# Altium PCB DVD.PcbDoc (part 1 of 2)
Units mm, origin at the board's own origin, x right, y up, seen from the top; angles counter-clockwise.
Board outline 60 x 90 mm, 2 copper layers (Top Layer, Bottom Layer), stack 1.671 mm thick; 69 components, 43 nets, 255 pads, 31 vias.
Unrouted connection lines stored in the file: 70.
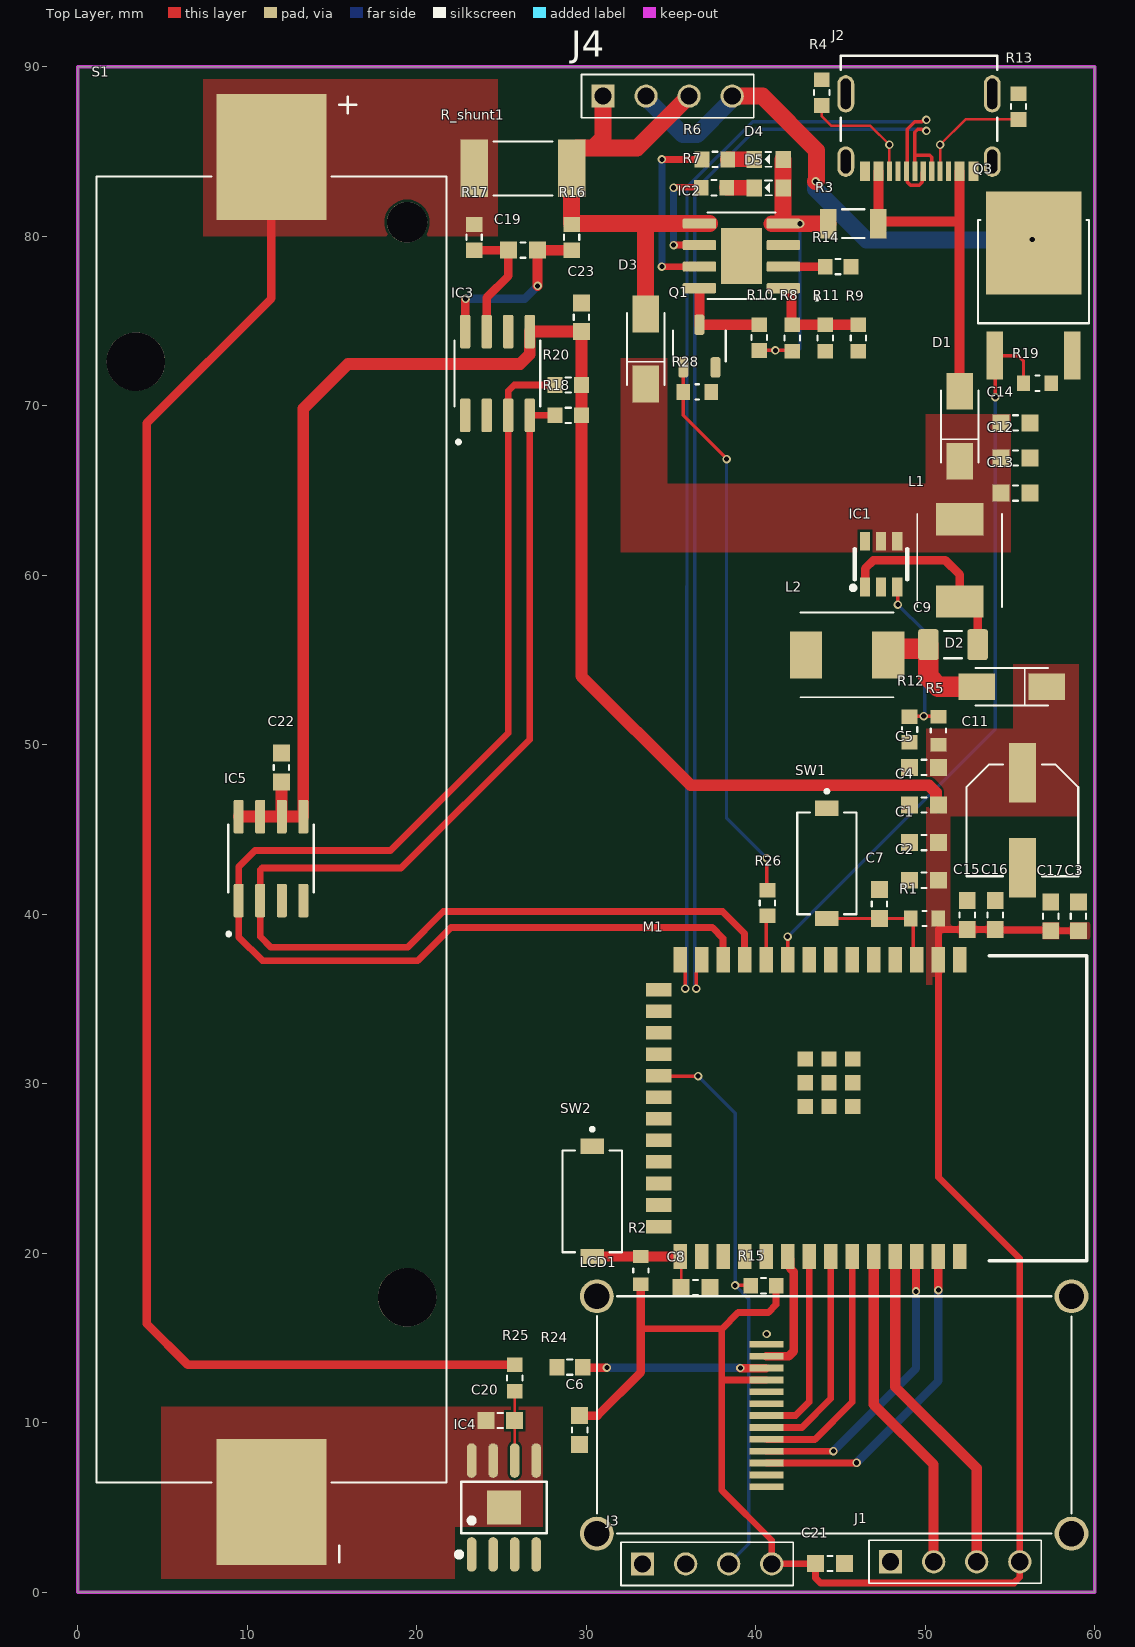
[diagram p0: Top Layer view]
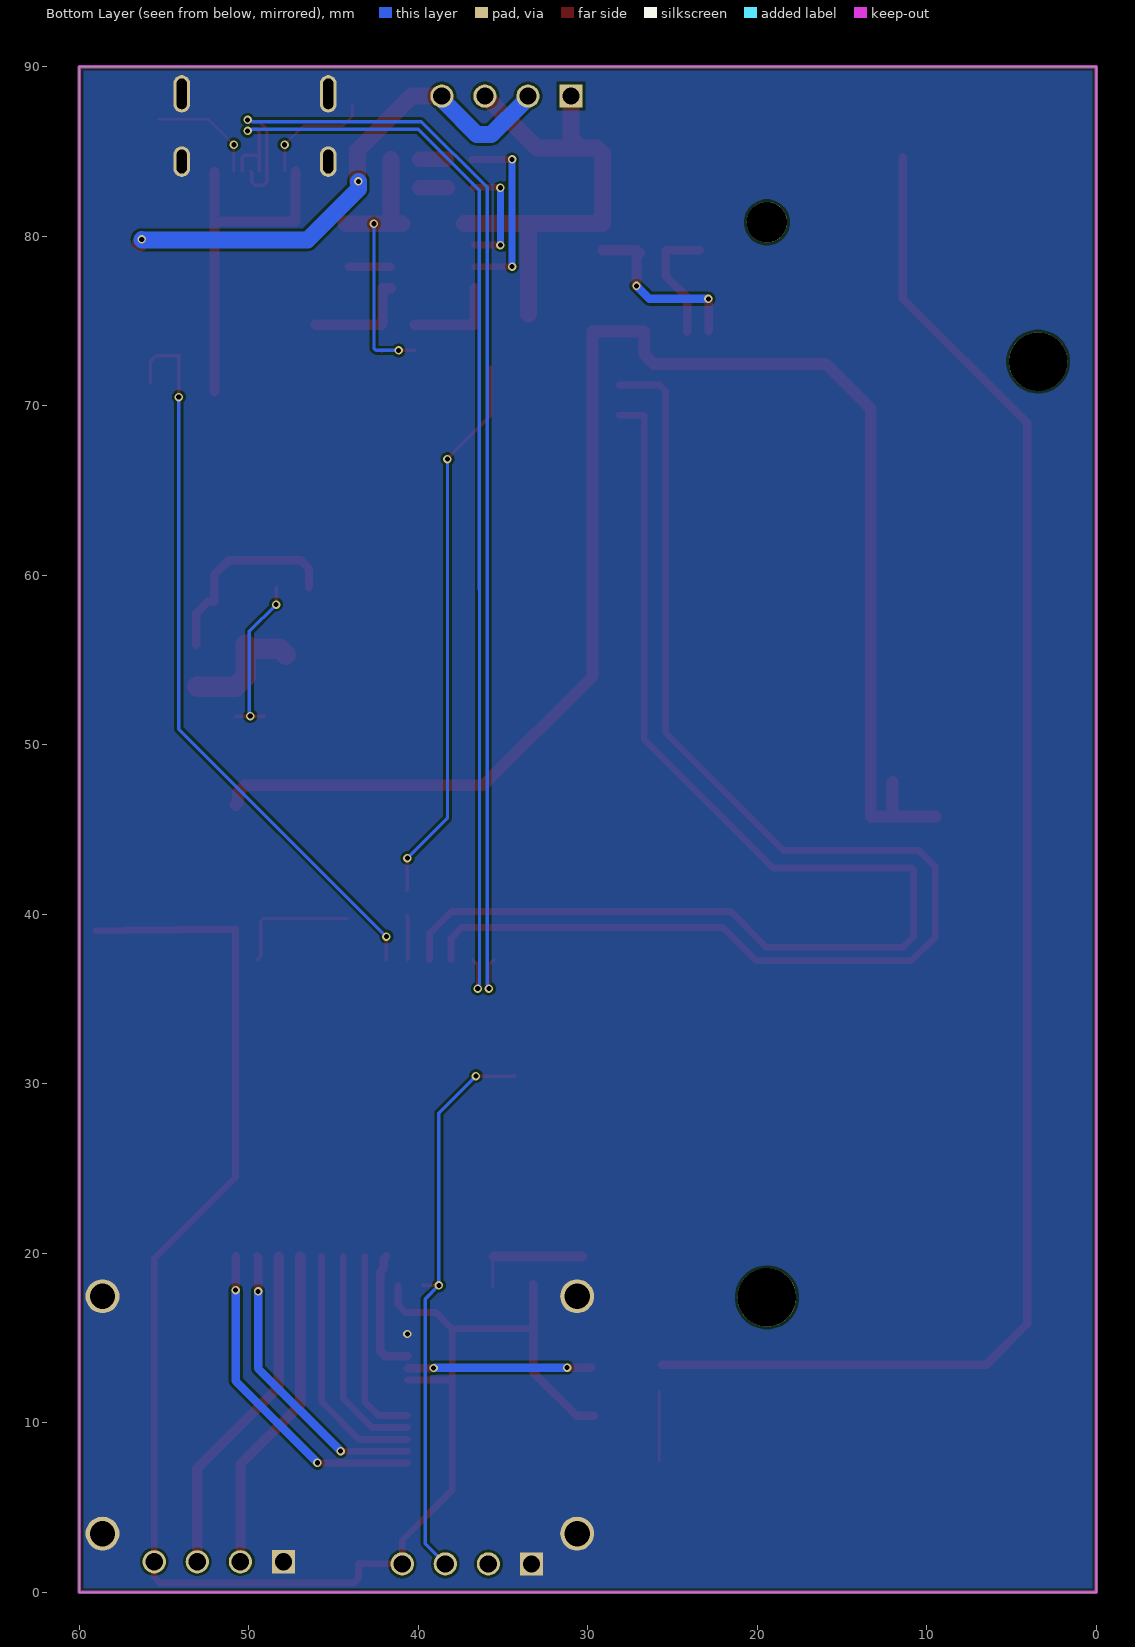
[diagram p1: Bottom Layer view, seen from below]
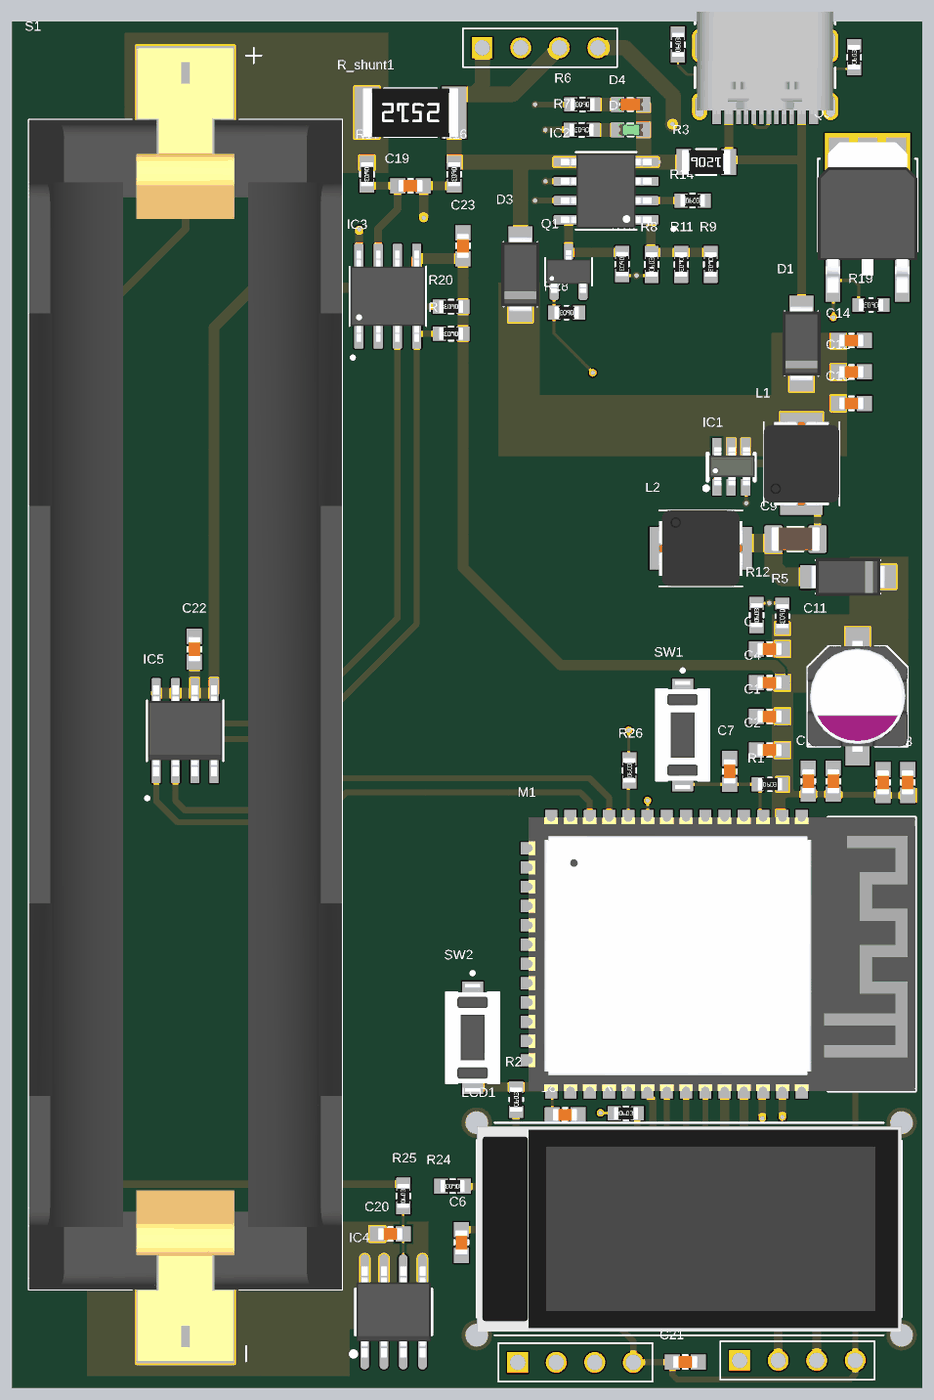
[diagram p2: 3D render of the assembled board from above, using the file's embedded part models]

## Layer stack, top to bottom
Top Solder: solder mask 0.0102, Solder Resist, Dk 3.5
Top Layer: signal copper 0.0356
Dielectric 1: dielectric 1.6, FR-4, Dk 4.8
Bottom Layer: signal copper 0.0356
Bottom Solder: solder mask 0.0102, Solder Resist, Dk 3.5

## Board outline
0,0 60,0 60,90 0,90

## Design rules (kind name [scope] priority, off if disabled: settings)
Clearance [All] p1: gap=0.15 ignorepadtopadclearanceinfootprint=FALSE
DiffPairsRouting [All] p1: maxlimit=0.254 minlimit=0.2 mostfreqgap=0.254 toplayer_minwidth=0.2 toplayer_maxwidth=0.381 toplayer_prefwidth=0.381 bottomlayer_minwidth=0.2 bottomlayer_maxwidth=0.381 bottomlayer_prefwidth=0.381 maxuncoupledlength=12.7
HoleSize [All] p1: absolutevalues=TRUE maxlimit=5 minlimit=0.025 maxpercent=80.000 minpercent=20.000
HoleToHoleClearance [All] p1: gap=0.05 allowstackedmicrovias=TRUE
MinimumSolderMaskSliver [All] p1: minsoldermaskwidth=0.05
PlaneConnect [All] p1: planeconnectstyle=Direct reliefexpansion=0.508 reliefentries=4 reliefconductorwidth=0.254 reliefairgap=0.254
PolygonConnect [All] p1: connectstyle=Direct reliefconductorwidth=0.254 reliefentries=4 polygonreliefangle="90 Angle" airgapwidth=0.254
RoutingVias [All] p1: holewidth=0.3 width=0.5 viastyle="Through Hole" minholewidth=0.3 minwidth=0.5 maxholewidth=3 maxwidth=5
SilkToSilkClearance [All] p1: silktosilkclearance=0.05
SilkToSolderMaskClearance [IsPad] p1: minsilkscreentomaskgap=0.05 clearancetoexposedcopper=TRUE
SolderMaskExpansion [All] p1: expansion=0.102 istentingtop=FALSE
Width [All] p1: maxlimit=3 minlimit=0.15 preferedwidth=0.15
23 further rules are at their usual default settings.

## Classes and differential pairs
differential pair ESP-D: +ESP-D_P -ESP-D_N

## Components (designator, comment, footprint, x,y, rotation, side; value= is the part's Value field where it differs from the comment)
C1 "22 µF ±20% 10V Ceramic Capacitor X5R 0603 (1608 Metric)" SMD-CAP-0603-YAGEO 49.925,44.226 r0 top value=22uF
C2 "10 µF ±20% 25V Ceramic Capacitor X5R 0603 (1608 Metric)" SMD-CAP-0603-YAGEO 49.925,42.006 r180 top value=10uF
C3 "1 µF ±10% 16V Ceramic Capacitor X7R 0603 (1608 Metric)" SMD-CAP-0603-YAGEO 59.03,39.878 r90 top value=1uF
C4 "1 µF -20%, +80% 10V Ceramic Capacitor Y5V (F) 0603 (1608 Metric)" SMD-CAP-0603-YAGEO 49.925,46.446 r0 top value=1uF
C5 "0.1 µF ±10% 16V Ceramic Capacitor X7R 0603 (1608 Metric)" SMD-CAP-0603-YAGEO 49.925,48.666 r0 top value=0.1uF
C6 "0.1 µF ±10% 16V Ceramic Capacitor X7R 0603 (1608 Metric)" SMD-CAP-0603-YAGEO 29.616,9.576 r90 top value=0.1uF
C7 "0.1 µF ±10% 100V Ceramic Capacitor X7R 0603 (1608 Metric)" SMD-CAP-0603-YAGEO 47.295,40.601 r270 top value=0.1uF
C8 "0.1 µF ±10% 100V Ceramic Capacitor X7R 0603 (1608 Metric)" SMD-CAP-0603-YAGEO 36.449,17.983 r180 top value=0.1uF
C9 "1 µF ±10% 100V Ceramic Capacitor X7R 1206 (3216 Metric)" SMD-CAP-1206-KEMET 51.638,55.905 r180 top value=1uF
C11 "100 µF 25 V Aluminum - Polymer Capacitors Radial, Can - SMD 30mOhm 10000 Hrs @ 105°C" SMD-DxLxW-6.3x6.6x6.6-PEC 55.728,45.542 r270 top value=100uF
C12 "10 µF ±20% 25V Ceramic Capacitor X5R 0603 (1608 Metric)" SMD-CAP-0603-YAGEO 55.321,66.916 r180 top value=10uF
C13 "1 µF -20%, +80% 10V Ceramic Capacitor Y5V (F) 0603 (1608 Metric)" SMD-CAP-0603-YAGEO 55.321,64.846 r180 top value=1uF
C14 "0.1 µF ±10% 16V Ceramic Capacitor X7R 0603 (1608 Metric)" SMD-CAP-0603-YAGEO 55.321,68.986 r180 top value=0.1uF
C15 "10 µF ±20% 25V Ceramic Capacitor X5R 0603 (1608 Metric)" SMD-CAP-0603-YAGEO 52.476,39.954 r90 top value=10uF
C16 "2.2 µF ±10% 25V Ceramic Capacitor X5R 0603 (1608 Metric)" SMD-CAP-0603-YAGEO 54.127,39.954 r270 top value=2.2uF
C17 "0.1 µF ±10% 100V Ceramic Capacitor X7R 0603 (1608 Metric)" SMD-CAP-0603-YAGEO 57.404,39.878 r270 top value=0.1uF
C19 "0.1 µF ±10% 10V Ceramic Capacitor X7R 0603 (1608 Metric)" SMD-CAP-0603-YAGEO 26.264,79.174 r180 top value=0.01uF
C20 "0.1 µF ±10% 16V Ceramic Capacitor X7R 0603 (1608 Metric)" SMD-CAP-0603-YAGEO 24.931,10.135 r0 top value=0.1uF
C21 "0.1 µF ±10% 16V Ceramic Capacitor X7R 0603 (1608 Metric)" SMD-CAP-0603-YAGEO 44.374,1.702 r180 top value=0.1uF
C22 "0.1 µF ±10% 16V Ceramic Capacitor X7R 0603 (1608 Metric)" SMD-CAP-0603-YAGEO 12.014,48.653 r270 top value=0.1uF
C23 "0.1 µF ±10% 16V Ceramic Capacitor X7R 0603 (1608 Metric)" SMD-CAP-0603-YAGEO 29.718,75.221 r270 top value=0.1uF
D1 "Diode 40 V 3A Surface Mount DO-214AC (SMA)" SMD-DO-214AC-214-CT 52.032,68.783 r90 top
D2 "Diode 40 V 3A Surface Mount DO-214AC (SMA)" SMD-DO-214AC-214-CT 55.1,53.416 r180 top
D3 "Diode 40 V 3A Surface Mount DO-214AC (SMA)" SMD-DO-214AC-214-CT 33.503,73.348 r90 top
D4 "0603 RED" LED0603_RED 40.767,84.531 r180 top
D5 "0603 GREEN" LED0603_GREEN 40.767,82.855 r180 top
IC1 "SX1308" SOT23-6-SX1308 46.446,59.301 r90 top
IC2 "TP4056" SOIC-8-TP4056 39.153,78.838 r180 top
IC3 "Current Monitor Regulator High-Side 10mA 8-SOIC" SOIC-8-TI 24.765,71.901 r90 top
IC4 "XB8089D" SOIC-8-XB8089D 25.146,5.004 r0 top
IC5 "Temperature Sensor Digital, Local -55°C ~ 125°C 9 b 8-SOIC" SOIC-8-ADI 11.405,43.282 r90 top
J1 "Connector Header Through Hole 4 position 0.100\" (2.54mm)" "HEADER-2.54-4 - U3D" 51.765,1.803 r0 top
J2 "USB-C (USB TYPE-C) USB 2.0 Receptacle Connector 24 (16+8 Dummy) Position Surface Mount, Right Angle; Through Hole" TYPE-C-HOR-RECEPTACLE-24PIN-MOLEX 49.632,87.249 r180 top
J3 "Connector Header Through Hole 4 position 0.100\" (2.54mm)" "HEADER-2.54-4 - U3D" 37.135,1.676 r0 top
J4 "Connector Header Through Hole 4 position 0.100\" (2.54mm)" "HEADER-2.54-4 - U3D" 34.798,88.265 r0 top
L1 "2.2 µH Shielded Drum Core, Wirewound Inductor 6.3 A 22mOhm Max 2-SMD, J-Lead" SMD-HxLxW-3.0x5.5x5.0-PEC 52.032,60.872 r270 top value=2.2uH
L2 "2.2 µH Shielded Drum Core, Wirewound Inductor 6.3 A 22mOhm Max 2-SMD, J-Lead" SMD-HxLxW-3.0x5.5x5.0-PEC 45.39,55.296 r180 top value=2.2uH
LCD1 "LCD ST7789" ST7735S-80x160-0.96INCH 44.628,10.465 r0 top locked
M1 "Bluetooth, WiFi 802.11b/g/n, Bluetooth v4.2 +EDR Transceiver Module 2.4GHz ~ 2.5GHz PCB Trace Surface Mount" MODULE-ESP32-S3-WROOM-1-N16R8 46.785,28.563 r270 top
Q1 "N-Channel 30 V 5.7A (Ta) 1.4W (Ta) Surface Mount SOT-23-3" SOT23-3-AOEI 36.678,73.518 r90 top value=5.7A
Q3 "N-Channel 60 V 7A (Ta), 37A (Tc) 2.1W (Ta), 60W (Tc) Surface Mount TO-252 (DPAK)" TO252 56.388,77.089 r90 top
R1 "10 kOhms ±1% 0.1W, 1/10W Chip Resistor 0603 (1608 Metric) Moisture Resistant Thick Film" SMD-RES-0603-YAGEO 49.955,39.751 r0 top value=10K
R2 "10 kOhms ±1% 0.1W, 1/10W Chip Resistor 0603 (1608 Metric) Moisture Resistant Thick Film" SMD-RES-0603-YAGEO 33.223,18.993 r90 top value=10K
R3 "100 mOhms ±5% 0.25W, 1/4W Chip Resistor 1206 (3216 Metric) Current Sense Thick Film" SMD-RES-1206-YAGEO 45.752,80.743 r180 top value=0.1R
R4 "5.1 kOhms ±1% 0.1W, 1/10W Chip Resistor 0603 (1608 Metric) Automotive AEC-Q200 Thick Film" SMD-RES-0603-SEI 43.891,88.468 r90 top value=5.1K
R5 "10 kOhms ±1% 0.1W, 1/10W Chip Resistor 0603 (1608 Metric) Moisture Resistant Thick Film" SMD-RES-0603-YAGEO 50.775,50.83 r270 top value=10K
R6 "1 kOhms ±1% 0.25W, 1/4W Chip Resistor 0603 (1608 Metric) Automotive AEC-Q200, Pulse Withstanding Thick Film" SMD-RES-0603-SEI 37.592,84.531 r180 top value=1K
R7 "1 kOhms ±1% 0.25W, 1/4W Chip Resistor 0603 (1608 Metric) Automotive AEC-Q200, Pulse Withstanding Thick Film" SMD-RES-0603-SEI 37.541,82.855 r180 top value=1K
R8 "510 mOhms ±1% 0.2W, 1/5W Chip Resistor 0603 (1608 Metric) Automotive AEC-Q200, Current Sense Thick Film" SMD-RES-0603-RS 42.156,73.993 r90 top value=0.5R
R9 "510 mOhms ±1% 0.2W, 1/5W Chip Resistor 0603 (1608 Metric) Automotive AEC-Q200, Current Sense Thick Film" SMD-RES-0603-RS 46.05,73.993 r270 top value=0.5R
R10 "1 kOhms ±1% 0.25W, 1/4W Chip Resistor 0603 (1608 Metric) Automotive AEC-Q200, Pulse Withstanding Thick Film" SMD-RES-0603-SEI 40.208,74.018 r270 top value=1K
R11 "510 mOhms ±1% 0.2W, 1/5W Chip Resistor 0603 (1608 Metric) Automotive AEC-Q200, Current Sense Thick Film" SMD-RES-0603-RS 44.103,73.993 r270 top value=0.5R
R12 "2.2 kOhms ±1% 0.1W, 1/10W Chip Resistor 0603 (1608 Metric) Automotive AEC-Q200 Thick Film" SMD-RES-0603-SEI 49.075,50.895 r90 top value=2.2K
R13 "5.1 kOhms ±1% 0.1W, 1/10W Chip Resistor 0603 (1608 Metric) Automotive AEC-Q200 Thick Film" SMD-RES-0603-SEI 55.499,87.644 r90 top value=5.1K
R14 "1 kOhms ±1% 0.25W, 1/4W Chip Resistor 0603 (1608 Metric) Automotive AEC-Q200, Pulse Withstanding Thick Film" SMD-RES-0603-SEI 44.858,78.203 r0 top value=1K
R15 "5.1 kOhms ±1% 0.1W, 1/10W Chip Resistor 0603 (1608 Metric) Automotive AEC-Q200 Thick Film" SMD-RES-0603-SEI 40.462,18.085 r0 top value=5.1K
R16 "10 Ohms ±1% 0.1W, 1/10W Chip Resistor 0603 (1608 Metric) Automotive AEC-Q200 Thick Film" SMD-RES-0603-SE 29.137,79.934 r270 top value=10R
R17 "10 Ohms ±1% 0.1W, 1/10W Chip Resistor 0603 (1608 Metric) Automotive AEC-Q200 Thick Film" SMD-RES-0603-SE 23.391,79.934 r270 top value=10R
R18 "4.7 kOhms ±1% 0.1W, 1/10W Chip Resistor 0603 (1608 Metric) Anti-Sulfur Thick Film" SMD-RES-0603-RS 28.938,69.431 r180 top value=4.7K
R19 "10 kOhms ±1% 0.1W, 1/10W Chip Resistor 0603 (1608 Metric) Moisture Resistant Thick Film" SMD-RES-0603-YAGEO 56.617,71.323 r180 top value=10K
R20 "4.7 kOhms ±1% 0.1W, 1/10W Chip Resistor 0603 (1608 Metric) Anti-Sulfur Thick Film" SMD-RES-0603-RS 28.938,71.222 r180 top value=4.7K
R24 "10 Ohms ±1% 0.1W, 1/10W Chip Resistor 0603 (1608 Metric) Automotive AEC-Q200 Thick Film" SMD-RES-0603-SE 29.032,13.284 r180 top value=10R
R25 "100 Ohms ±1% 0.1W, 1/10W Chip Resistor 0603 (1608 Metric) Automotive AEC-Q200, High Voltage Thick Film" SMD-RES-0603-RS 25.781,12.642 r90 top value=100R
R26 "0 Ohms Jumper Chip Resistor 0603 (1608 Metric) Automotive AEC-Q200 Thick Film" SMD-RES-0603-SEI 40.691,40.665 r90 top value=0R
R28 "10 kOhms ±1% 0.1W, 1/10W Chip Resistor 0603 (1608 Metric) Moisture Resistant Thick Film" SMD-RES-0603-YAGEO 36.548,70.815 r180 top value=10K
R_shunt1 "0.1R" SMD-RES-2512-VD 26.264,83.998 r180 top value=10mR
S1 "1042" SMD-18650-BAT-1042 11.43,45 r90 top locked
SW1 "Tactile Switch SPST-NO Top Actuated Surface Mount" SW-HxLxW-5.0x6.0x3.5-C&K 44.196,43.001 r270 top
SW2 "Tactile Switch SPST-NO Top Actuated Surface Mount" SW-HxLxW-5.0x6.0x3.5-C&K 30.353,23.063 r270 top

## Footprints (in the part's own frame and the unit in brackets; to place one, negate y for a bottom-side part, rotate by r counter-clockwise, add the part's x,y. Pads: shape width x height; smd on the part's side, far side on the other; paste and mask are expansions set on the pad)
"HEADER-2.54-4 - U3D" [mm]
  rect 1.37x1.37 / inner round 1.37 / far side rect 1.37x1.37 hole 1.02: 01(-3.81,0)
  round 1.37 hole 1.02: 02(-1.27,0) 03(1.27,0) 04(3.81,0)
  silkscreen extent -5.08,-1.27 5.08,1.27
LED0603_GREEN [mm]
  rect 0.9x1 smd paste+0 mask+0.051: 1(-0.85,0) 2(0.85,0)
  silkscreen extent -0.2,-0.43 0.23,0.43, body extent -0.82,-0.4 0.78,0.4, height 0.53
LED0603_RED [mm]
  rect 0.9x1 smd paste+0 mask+0.051: 1(-0.85,0) 2(0.85,0)
  silkscreen extent -0.18,-0.43 0.23,0.43, body extent -0.82,-0.4 0.78,0.4, height 0.53
MODULE-ESP32-S3-WROOM-1-N16R8 [mm]
  rect 1.5x0.8 smd: 1(-8.75,5.26) 2(-8.75,3.99) 3(-8.75,2.72) 4(-8.75,1.45) 5(-8.75,0.18) 6(-8.75,-1.09) 7(-8.75,-2.36) 8(-8.75,-3.63) 9(-8.75,-4.9) 10(-8.75,-6.17) 11(-8.75,-7.44) 12(-8.75,-8.71) 13(-8.75,-9.98) 14(-8.75,-11.25) 27(8.75,-11.25) 28(8.75,-9.98) 29(8.75,-8.71) 30(8.75,-7.44) 31(8.75,-6.17) 32(8.75,-4.9) 33(8.75,-3.63) 34(8.75,-2.36) 35(8.75,-1.09) 36(8.75,0.18) 37(8.75,1.45) 38(8.75,2.72) 39(8.75,3.99) 40(8.75,5.26)
  rect 0.8x1.5 smd: 15(-6.985,-12.5) 16(-5.715,-12.5) 17(-4.445,-12.5) 18(-3.175,-12.5) 19(-1.905,-12.5) 20(-0.635,-12.5) 21(0.635,-12.5) 22(1.905,-12.5) 23(3.175,-12.5) 24(4.445,-12.5) 25(5.715,-12.5) 26(6.985,-12.5)
  rect 0.9x0.9 smd: 41(-1.5,-2.46) 42(-1.5,-1.06) 43(-2.9,-1.06) 44(-2.9,-2.46) 45(-2.9,-3.86) 46(-1.5,-3.86) 47(-0.1,-3.86) 48(-0.1,-2.46) 49(-0.1,-1.06)
  silkscreen extent -9,7 9,12.75, body extent -9,-12.75 9,12.75, height 3.25
SMD-18650-BAT-1042 [mm]
  rect 7.46x6.47 smd: N(-39.67,0) P(39.67,0)
  round 3.45 hole 3.45 unplated: ""(-27.6,-8) ""(27.6,8)
  round 2.39 hole 2.39 unplated: ""(35.82,-8)
  silkscreen extent -43.25,-10.32 43.25,10.32, body extent -43.23,-10.33 43.23,10.33, height 14.86
SMD-CAP-0603-YAGEO [mm]
  rect 1x1 smd: 1(-0.85,0) 2(0.85,0)
  silkscreen extent -0.15,-0.45 0.15,0.45, body extent -0.8,-0.4 0.8,0.4, height 0.87
SMD-CAP-1206-KEMET [mm]
  rrect25% 1.21x1.82 smd: 1(-1.45,0) 2(1.45,0)
  silkscreen extent -0.52,-0.8 0.52,0.8, body extent -1.6,-0.8 1.6,0.8, height 1.4
SMD-DO-214AC-214-CT [mm]
  rect 2.17x1.57 smd: 1(-2.065,0) 2(2.065,0)
  silkscreen extent -2.12,-1.12 2.12,1.12, body extent -2.47,-1.25 2.47,1.25, height 2.2
SMD-DxLxW-6.3x6.6x6.6-PEC [mm]
  rect 3.5x1.6 smd: 1(-2.8,0) 2(2.8,0)
  silkscreen extent -3.3,-3.3 3.3,3.3, body extent -3.65,-3.3 3.65,3.3, height 5.9
SMD-HxLxW-3.0x5.5x5.0-PEC [mm]
  rect 1.905x2.79 smd: 1(-2.425,0) 2(2.425,0)
  silkscreen extent -2.75,-2.5 2.75,2.5, body extent -2.75,-2.5 2.75,2.5, height 3.01
SMD-RES-0603-RS [mm]
  rect 0.87x0.93 smd: 1(-0.78,0) 2(0.78,0)
  silkscreen extent -0.15,-0.45 0.15,0.45, body extent -0.8,-0.4 0.8,0.4, height 0.47
SMD-RES-0603-SE [mm]
  rect 0.9x0.97 smd: 1(-0.76,0) 2(0.76,0)
  silkscreen extent -0.15,-0.45 0.15,0.45, body extent -0.8,-0.4 0.8,0.4, height 0.47
SMD-RES-0603-SEI [mm]
  rect 0.87x0.93 smd: 1(-0.755,0) 2(0.755,0)
  silkscreen extent -0.15,-0.45 0.15,0.45, body extent -0.8,-0.4 0.8,0.4, height 0.47
SMD-RES-0603-YAGEO [mm]
  rect 0.79x0.93 smd: 1(-0.82,0) 2(0.82,0)
  silkscreen extent -0.11,-0.45 0.11,0.45, body extent -0.8,-0.4 0.8,0.4, height 0.47
SMD-RES-1206-YAGEO [mm]
  rect 0.97x1.73 smd: 1(-1.48,0) 2(1.48,0)
  silkscreen extent -0.67,-0.85 0.67,0.85, body extent -1.6,-0.8 1.6,0.8, height 0.62
SMD-RES-2512-VD [mm]
  rect 1.62x3.4 smd: 1(-2.873,0) 2(2.873,0)
  silkscreen extent -1.74,-1.59 1.74,1.59, body extent -3.15,-1.6 3.15,1.6, height 0.66
SOIC-8-ADI [mm]
  rrect25% 1.97x0.59 smd: 1(-2.475,1.905) 2(-2.475,0.635) 3(-2.475,-0.635) 4(-2.475,-1.905) 5(2.475,-1.905) 6(2.475,-0.635) 7(2.475,0.635) 8(2.475,1.905)
  silkscreen extent -4.54,-2.52 2,2.59, body extent -3,-2.45 3,2.45, height 1.75
SOIC-8-TI [mm]
  rrect25% 1.97x0.6 smd paste+0 mask+0.102: 1(-2.47,1.905) 2(-2.47,0.635) 3(-2.47,-0.635) 4(-2.47,-1.905) 5(2.47,-1.905) 6(2.47,-0.635) 7(2.47,0.635) 8(2.47,1.905)
  silkscreen extent -4.14,-2.53 1.95,2.53, body extent -3,-2.45 3,2.45, height 1.75
SOIC-8-TP4056 [mm]
  rrect25% 1.97x0.6 smd: 1(-2.475,1.905) 2(-2.475,0.635) 3(-2.475,-0.635) 4(-2.475,-1.905) 5(2.475,-1.905) 6(2.475,-0.635) 7(2.475,0.635) 8(2.475,1.905)
  rect 2.413x3.302 smd paste-3: 9(0,0)
  silkscreen extent -4.54,-2.55 2,2.6, body extent -3,-2.45 3,2.45, height 1.75
SOIC-8-XB8089D [mm]
  oval 0.574x2.038 smd: 1(-1.905,-2.769) 2(-0.635,-2.769) 3(0.635,-2.769) 4(1.905,-2.769) 5(1.905,2.769) 6(0.635,2.769) 7(-0.635,2.769) 8(-1.905,2.769)
  rect 2x2 smd: 9(0,0)
  silkscreen extent -2.79,-2.92 2.53,1.52, body extent -2.45,-3 2.45,3, height 1.75
SOT23-3-AOEI [mm]
  rrect50% 1.21x0.59 smd: 1(-1.255,0.95) 2(-1.255,-0.95) 3(1.255,0)
  silkscreen extent -0.9,-1.55 0.9,1.55, body extent -1.4,-1.45 1.4,1.45, height 1.25
SOT23-6-SX1308 [mm]
  rect 1.1x0.6 smd paste+0 mask+0.051: 1(0,0) 2(0,-0.95) 3(0,-1.9) 4(2.7,-1.9) 5(2.7,-0.95) 6(2.7,0)
  silkscreen extent -0.17,-2.5 2.25,0.83, body extent 0.15,-2.52 2.65,0.48, height 1.1
ST7735S-80x160-0.96INCH [mm]
  rect 2x0.4 smd: 1(-4,-4.236) 2(-4,-3.536) 3(-4,-2.836) 4(-4,-2.136) 5(-4,-1.436) 6(-4,-0.736) 7(-4,-0.036) 8(-4,0.664) 9(-4,1.364) 10(-4,2.064) 11(-4,2.764) 12(-4,3.464) 13(-4,4.164)
  round 2 hole 1.5 mask+0.102: 14(-14,7) 15(14,7) 16(-14,-7) 17(14,-7)
  silkscreen extent -14,-7 14,7, body extent -13.98,-6.74 13.98,6.74, height 2.87
SW-HxLxW-5.0x6.0x3.5-C&K [mm]
  rect 0.9x1.4 smd: 1(-3.25,0) 2(3.25,0)
  silkscreen extent -4.35,-1.75 3,1.75, body extent -3.55,-1.75 3.55,1.75, height 4.3
TO252 [mm]
  rect 2.83x0.97 smd: 1(-4.14,2.29) 2(-4.14,-2.29)
  rect 6.1x5.63 smd paste-4: 3(2.51,0)
  silkscreen extent -2.22,-3.27 3.87,3.27, body extent -4.95,-3.27 4.95,3.27, height 2.51
TYPE-C-HOR-RECEPTACLE-24PIN-MOLEX [mm]
  rect 0.59x1.15 smd mask+0.064: A1B12(-3.2,3.425) A4B9(-2.4,3.425) B1A12(3.2,3.425) B4A9(2.4,3.425)
  rect 0.298x1.15 smd mask+0.064: A5(-1.25,3.425) A6(-0.25,3.425) A7(0.25,3.425) A8(1.25,3.425) B5(1.75,3.425) B6(0.75,3.425) B7(-0.75,3.425) B8(-1.75,3.425)
  oval 1x2.2 hole 0.6 slot 1.8 at 90 deg mask+0.064: SHIELD(-4.32,-1.15) SHIELD(4.32,-1.15)
  oval 1x1.8 hole 0.6 slot 1.4 at 90 deg mask+0.064: SHIELD(-4.32,2.85) SHIELD(4.32,2.85)
  silkscreen extent -4.62,-3.4 4.62,1.63, body extent -4.47,-3.38 4.47,3.38, height 3.17

## Part data
C1: library part "CAP; 22uF; 25V; SMD; CC0603MRX5R6BB226", "Multilayer Ceramic Capacitor, 22 uF, 10 V, ï¿½ 20%, X5R, 0603 [1608 Metric]", Manufacturer=Yageo, Manufacturer Part Number=CC0603MRX5R6BB226, Package=0603, Supplier Part Number=9078094, Category="Ceramic Capacitors", ComponentLink1Description=http://www.mouser.com/ds/2/447/Yageo_UPY-GP_NP0_16V-to-50V_9-358835.pdf?src-supplier=Mouser, ComponentLink1URL=http://www.mouser.com/ds/2/447/Yageo_UPY-GP_NP0_16V-to-50V_9-358835.pdf?src-supplier=Mouser, ComponentLink2Description=http://www.yageo.com/documents/recent/UPY-GPHC_X5R_4V-to-50V_25.pdf?src-supplier=Digikey, ComponentLink2URL=http://www.yageo.com/documents/recent/UPY-GPHC_X5R_4V-to-50V_25.pdf?src-supplier=Digikey, ComponentLink3Description=https://datasheet.octopart.com/CC0603MRX5R6BB226-Yageo-datasheet-137875056.pdf?src-supplier=Future+Electronics, ComponentLink3URL=https://datasheet.octopart.com/CC0603MRX5R6BB226-Yageo-datasheet-137875056.pdf?src-supplier=Future+Electronics, ComponentLink4Description="Link Digikey", ComponentLink4URL=https://www.digikey.com/en/products/detail/yageo/CC0603MRX5R6BB226/5195226, Designer=TVBac, Halogen Free=5694HalogenFree, Lead Free=5697LeadFree, Pricing="4000=0.122, 8000=0.12, 12000=0.119, 16000=0.118 (USD)", RoHS=No, RoHS Compliant=5897YesNo, Stock=780000, Supplier="Future Electronics"
C2 C12 C15: library part "CAP; 10uF; 25V; SMD; 0603; CC0603MRX5R8BB106", "Multilayer Ceramic Capacitor, 10 uF, 25 V, ï¿½ 20%, X5R, 0603 [1608 Metric]", Case Code (Imperial)=0603, Case Code (Metric)=1608, Dielectric=X5R, Manufacturer=Yageo, Manufacturer Part Number=CC0603MRX5R8BB106, Max Operating Temperature=85°C, Min Operating Temperature=-55°C, Supplier Part Number=3086968, Tolerance=20%, Voltage Rating=25V, Case/Package=0603, Category="Ceramic Capacitors", ComponentLink1Description=https://www.yageo.com/upload/media/product/productsearch/datasheet/mlcc/UPY-GPHC_X5R_4V-to-50V_26.pdf?src-supplier=Digikey, ComponentLink1URL=https://www.yageo.com/upload/media/product/productsearch/datasheet/mlcc/UPY-GPHC_X5R_4V-to-50V_26.pdf?src-supplier=Digikey, ComponentLink2Description=https://datasheet.octopart.com/CC0603MRX5R8BB106-Yageo-datasheet-182965619.pdf?src-supplier=Farnell, ComponentLink2URL=https://datasheet.octopart.com/CC0603MRX5R8BB106-Yageo-datasheet-182965619.pdf?src-supplier=Farnell, ComponentLink3Description="Link Digikey", ComponentLink3URL=https://www.digikey.com/en/products/detail/yageo/CC0603MRX5R8BB106/7164378, Designer=TVBac, Halogen Free="Halogen Free", Lead Free="Lead Free", Mounting Technology="Surface Mount", Package=0603, Packaging="Cut Tape", Pricing="4000=0.155, 8000=0.153, 12000=0.151 (USD)", RoHS=Yes, RoHS Compliant=Yes, Series=CC, Stock=296000, Supplier="Future Electronics", Voltage Rating (DC)=25V
C3: library part "CAP; 1uF; 16V; 0603; SMD; CC0603KRX7R7BB105", "0603 1 uF 16 V ±10 % Tolerance X7R SMT Multilayer Ceramic Capacitor", Case Code (Imperial)=0603, Case Code (Metric)=1608, Dielectric=X7R, Manufacturer=Yageo, Manufacturer Part Number=CC0603KRX7R7BB105, Max Operating Temperature=125°C, Min Operating Temperature=-55°C, Package Quantity=1, Supplier Part Number=311-1446-1-ND, Tolerance=10%, Voltage=16V, Case/Package=0603, Category="Ceramic Capacitors", ComponentLink1Description=https://datasheet.ciiva.com/8033/1734573-8033801.pdf?src-supplier=Element14, ComponentLink1URL=https://datasheet.ciiva.com/8033/1734573-8033801.pdf?src-supplier=Element14, ComponentLink2Description=https://datasheet.ciiva.com/8033/1734573-8033800.pdf?src-supplier=Element14, ComponentLink2URL=https://datasheet.ciiva.com/8033/1734573-8033800.pdf?src-supplier=Element14, ComponentLink3Description=https://datasheet.ciiva.com/7978/1489800-7978143.pdf?src-supplier=Element14, ComponentLink3URL=https://datasheet.ciiva.com/7978/1489800-7978143.pdf?src-supplier=Element14, ComponentLink4Description=https://datasheet.ciiva.com/28450/1489800-28450557.pdf?src-supplier=Element14, ComponentLink4URL=https://datasheet.ciiva.com/28450/1489800-28450557.pdf?src-supplier=Element14, ComponentLink5Description=https://datasheet.ciiva.com/176/mlccorderingcode-176789.pdf?src-supplier=Digikey, ComponentLink5URL=https://datasheet.ciiva.com/176/mlccorderingcode-176789.pdf?src-supplier=Digikey, ComponentLink6Description=https://datasheet.ciiva.com/176/mlccorderingcode-176788.pdf?src-supplier=Digikey, ComponentLink6URL=https://datasheet.ciiva.com/176/mlccorderingcode-176788.pdf?src-supplier=Digikey, ComponentLink7Description=https://datasheet.ciiva.com/176/mlccorderingcode-176790.pdf?src-supplier=Digikey, ComponentLink7URL=https://datasheet.ciiva.com/176/mlccorderingcode-176790.pdf?src-supplier=Digikey, ComponentLink8Description=https://datasheet.ciiva.com/5425/upy-gphc-x7r-6-3v-to-50v-8-12304-5425495.pdf?src-supplier=Mouser, ComponentLink8URL=https://datasheet.ciiva.com/5425/upy-gphc-x7r-6-3v-to-50v-8-12304-5425495.pdf?src-supplier=Mouser, ComponentLink9Description="Link Digikey", ComponentLink9URL=https://www.digikey.com/en/products/detail/yageo/CC0603KRX7R7BB105/2833611?s=N4IgTCBcDaIMJwAwDZEGYDSAlAGgdizwCEiBGRAVhAF0BfIA, Construction=Flat, Depth=0.8mm, Designer=TVBac, Dissipation Factor=5%, Halogen Free=5694HalogenFree, Height=0.8mm, Lead Free=5697LeadFree, Length=1.6mm, Material=4241ConductorMaterial, Mounting Technology="Surface Mount", Package=0603, Packaging="Tape and Reel", Pins=2, Pricing="1=0.1, 10=0.066, 50=0.0392, 100=0.0308, 500=0.02274, 1000=0.01882, 4000=0.01785, 8000=0.01626, 12000=0.01545, 20000=0.01456, 28000=0.01404, 40000=0.01353, 100000=0.01313 (USD)", Radiation Hardening=No, Reach SVHC Compliant=Unknown, RoHS=Yes, RoHS Compliant=Yes, Series=CC, Stock=9165861, Supplier=Digikey, Termination=SMD/SMT, Thickness=0.035inch, Voltage Rating=16V, Voltage Rating (DC)=16V, Width=0.031inch
C4 C13: library part "CAP; 1uF; 10V; 0603; SMD; CC0603ZRY5V6BB105", "Surface Mount Ceramic Multilayer Capacitor 1uF -20% to 80% Y5V 10V 0603 Paper T/R", Dielectric Material=4241ConductorMaterial, Manufacturer=Yageo, Manufacturer Part Number=CC0603ZRY5V6BB105, Package=0603, Supplier Part Number=311-1357-1-ND, Voltage Rating (AC)=10V, Category="Ceramic Capacitors", ComponentLink1Description=https://datasheet.ciiva.com/23768/97931-23768032.pdf?src-supplier=Newark, ComponentLink1URL=https://datasheet.ciiva.com/23768/97931-23768032.pdf?src-supplier=Newark, ComponentLink2Description=https://datasheet.ciiva.com/144/mlccorderingcode-144397.pdf?src-supplier=Digikey, ComponentLink2URL=https://datasheet.ciiva.com/144/mlccorderingcode-144397.pdf?src-supplier=Digikey, ComponentLink3Description=https://datasheet.ciiva.com/144/mlccorderingcode-144398.pdf?src-supplier=Digikey, ComponentLink3URL=https://datasheet.ciiva.com/144/mlccorderingcode-144398.pdf?src-supplier=Digikey, ComponentLink4Description=https://datasheet.ciiva.com/144/mlccorderingcode-144399.pdf?src-supplier=Digikey, ComponentLink4URL=https://datasheet.ciiva.com/144/mlccorderingcode-144399.pdf?src-supplier=Digikey, ComponentLink5Description=https://datasheet.ciiva.com/5425/upy-gphc-y5v-6-3v-to-50v-5-5425434.pdf?src-supplier=Mouser, ComponentLink5URL=https://datasheet.ciiva.com/5425/upy-gphc-y5v-6-3v-to-50v-5-5425434.pdf?src-supplier=Mouser, ComponentLink6Description=https://datasheet.ciiva.com/7978/1132289-7978185.pdf?src-supplier=Element14, ComponentLink6URL=https://datasheet.ciiva.com/7978/1132289-7978185.pdf?src-supplier=Element14, ComponentLink7Description=https://datasheet.ciiva.com/8033/1132289-8033926.pdf?src-supplier=Element14, ComponentLink7URL=https://datasheet.ciiva.com/8033/1132289-8033926.pdf?src-supplier=Element14, ComponentLink8Description=https://datasheet.ciiva.com/8033/1132289-8033928.pdf?src-supplier=Element14, ComponentLink8URL=https://datasheet.ciiva.com/8033/1132289-8033928.pdf?src-supplier=Element14, ComponentLink9Description="Link Digikey", ComponentLink9URL=https://www.digikey.com/en/products/detail/yageo/CC0603ZRY5V6BB105/2103095, Designer=TVBac, Halogen Free=5694HalogenFree, Lead Free=5697LeadFree, Pricing="1=0.1, 10=0.041, 50=0.0234, 100=0.0182, 500=0.01366, 1000=0.01074 (USD)", RoHS=Yes, Stock=2070294, Supplier=Digikey
C5 C6 C14 C20 C21 C22 C23: library part "CAP; 0.1uF; 16V; 0603; SMD; CC0603KRX7R7BB104", "0603 0.1 uF 16 V ±10 % Tolerance X7R SMT Multilayer Ceramic Capacitor", Case Code (Imperial)=0603, Case Code (Metric)=1608, Dielectric=X7R, Insulation Resistance=100GR, Manufacturer=Yageo, Manufacturer Part Number=CC0603KRX7R7BB104, Max Operating Temperature=125°C, Min Operating Temperature=-55°C, Package Quantity=1, Supplier Part Number=311-1088-1-ND, Tolerance=10%, Voltage=16V, Case/Package=0603, Category="Ceramic Capacitors", ComponentLink1Description=https://datasheet.ciiva.com/11786/0900766b80d84f1d-11786077.pdf?src-supplier=Rs, ComponentLink1URL=https://datasheet.ciiva.com/11786/0900766b80d84f1d-11786077.pdf?src-supplier=Rs, ComponentLink2Description=https://datasheet.ciiva.com/8033/70765-8033799.pdf?src-supplier=Element14, ComponentLink2URL=https://datasheet.ciiva.com/8033/70765-8033799.pdf?src-supplier=Element14, ComponentLink3Description=https://datasheet.ciiva.com/7978/1489800-7978141.pdf?src-supplier=Element14, ComponentLink3URL=https://datasheet.ciiva.com/7978/1489800-7978141.pdf?src-supplier=Element14, ComponentLink4Description=https://datasheet.ciiva.com/28450/1489800-28450552.pdf?src-supplier=Element14, ComponentLink4URL=https://datasheet.ciiva.com/28450/1489800-28450552.pdf?src-supplier=Element14, ComponentLink5Description=https://datasheet.ciiva.com/46430/1734573-46430156.pdf?src-supplier=Element14, ComponentLink5URL=https://datasheet.ciiva.com/46430/1734573-46430156.pdf?src-supplier=Element14, ComponentLink6Description=https://datasheet.ciiva.com/144/mlccorderingcode-144183.pdf?src-supplier=Digikey, ComponentLink6URL=https://datasheet.ciiva.com/144/mlccorderingcode-144183.pdf?src-supplier=Digikey, ComponentLink7Description=https://datasheet.ciiva.com/144/mlccorderingcode-144182.pdf?src-supplier=Digikey, ComponentLink7URL=https://datasheet.ciiva.com/144/mlccorderingcode-144182.pdf?src-supplier=Digikey, ComponentLink8Description=https://datasheet.ciiva.com/144/mlccorderingcode-144184.pdf?src-supplier=Digikey, ComponentLink8URL=https://datasheet.ciiva.com/144/mlccorderingcode-144184.pdf?src-supplier=Digikey, ComponentLink9Description=https://datasheet.ciiva.com/8033/1734573-8033797.pdf?src-supplier=Element14, ComponentLink9URL=https://datasheet.ciiva.com/8033/1734573-8033797.pdf?src-supplier=Element14, ComponentLink10Description=https://datasheet.ciiva.com/13395/upy-gphc-x7r-6-3v-to-50v-8-13395674.pdf?src-supplier=Mouser, ComponentLink10URL=https://datasheet.ciiva.com/13395/upy-gphc-x7r-6-3v-to-50v-8-13395674.pdf?src-supplier=Mouser, ComponentLink11Description=https://datasheet.ciiva.com/11464/upy-gphc-x7r-6-3v-to-50v-8-11464735.pdf?src-supplier=Avnet, ComponentLink11URL=https://datasheet.ciiva.com/11464/upy-gphc-x7r-6-3v-to-50v-8-11464735.pdf?src-supplier=Avnet, ComponentLink12Description=https://datasheet.ciiva.com/15165/getdatasheetpartid-63554-15165387.pdf?src-supplier=Verical, ComponentLink12URL=https://datasheet.ciiva.com/15165/getdatasheetpartid-63554-15165387.pdf?src-supplier=Verical, ComponentLink13Description="Link Digikey", ComponentLink13URL=https://www.digikey.com/en/products/detail/yageo/CC0603KRX7R7BB104/302822, Depth=0.8mm, Designer=TVBac, Halogen Free="Halogen Free", Height=0.8mm, Lead Free="Lead Free", Length=1.6mm, Material=Ceramic, Mounting Technology="Surface Mount", Package=0603, Packaging="Tape and Reel", Pins=2, Pricing="1=0.1, 10=0.042, 50=0.0238, 100=0.0185, 500=0.01392, 1000=0.01094, 4000=0.00915, 8000=0.00836, 12000=0.00796, 28000=0.00756, 100000=0.00547, 200000=0.00529, 400000=0.00497 (USD)", Radiation Hardening=No, Reach SVHC Compliant=No, RoHS=Yes, RoHS Compliant=Yes, Series=CC, Stock=8705780, Supplier=Digikey, Termination=SMD/SMT, Thickness=0.035inch, Voltage Rating=16V, Voltage Rating (DC)=16V, Width=0.031inch
C7 C8 C17: library part "CAP; 0.1uF; 100V; 0603; SMD; CC0603KRX7R0BB104", "Multilayer Ceramic Capacitors MLCC - SMD/SMT 100V 0.1uF X7R 0603 10%", Case Code (Imperial)=0603, Case Code (Metric)=1608, Dielectric=X7R, Manufacturer=Yageo, Manufacturer Part Number=CC0603KRX7R0BB104, Max Operating Temperature=125°C, Min Operating Temperature=-55°C, Package Quantity=4000, Supplier Part Number=311-1523-1-ND, Tolerance=10%, Voltage Rating=100V, Case/Package=0603, Category="Ceramic Capacitors", ComponentLink1Description=https://datasheet.ciiva.com/6277/mlccorderingcode-6277082.pdf?src-supplier=Digikey, ComponentLink1URL=https://datasheet.ciiva.com/6277/mlccorderingcode-6277082.pdf?src-supplier=Digikey, ComponentLink2Description=https://datasheet.ciiva.com/6277/mlccorderingcode-6277081.pdf?src-supplier=Digikey, ComponentLink2URL=https://datasheet.ciiva.com/6277/mlccorderingcode-6277081.pdf?src-supplier=Digikey, ComponentLink3Description=https://datasheet.ciiva.com/6277/mlccorderingcode-6277030.pdf?src-supplier=Digikey, ComponentLink3URL=https://datasheet.ciiva.com/6277/mlccorderingcode-6277030.pdf?src-supplier=Digikey, ComponentLink4Description="Link Digikey", ComponentLink4URL=https://www.digikey.com/en/products/detail/yageo/CC0603KRX7R0BB104/3476111?s=N4IgTCBcDaIMwEYEFoEFYx1cgcgERAF0BfIA, Designer=TVBac, Height=900um, Lead Free=5697LeadFree, Length=0.063inch, Material=4241ConductorMaterial, Mounting Technology="Surface Mount", Package=0603, Packaging="Tape and Reel", Pricing="1=0.17, 10=0.113, 50=0.0676, 100=0.0531, 500=0.03922, 1000=0.03246, 4000=0.02764, 8000=0.02572, 12000=0.02443, 28000=0.02314, 100000=0.01752, 200000=0.0171, 400000=0.01607 (USD)", RoHS=Yes, RoHS Compliant=Yes, Series=CC, Stock=5373598, Supplier=Digikey, Termination=SMD/SMT, Thickness=0.035inch, Voltage Rating (DC)=100V, Weight=7.1E-05oz, Width=0.031inch
C9: library part "CAP; 1uF; 100V; 1206; C1206C105K1RACTU", "Multilayer Ceramic Capacitor, 1 uF, 100 V, ± 10%, X7R, 1206 [3216 Metric]", Case Code (Imperial)=1206, Case Code (Metric)=3216, Dielectric=X7R, Dielectric Material=Ceramic, Manufacturer=KEMET, Manufacturer Part Number=C1206C105K1RACTU, Max Operating Temperature=125°C, Min Operating Temperature=-55°C, Package Quantity=2000, Supplier Part Number=80-C1206C105K1R, Tolerance=10%, Voltage=100V, Case/Package=1206, Category="Ceramic Capacitors", ComponentLink1Description=http://www.farnell.com/datasheets/2741188.pdf?src-supplier=Farnell, ComponentLink1URL=http://www.farnell.com/datasheets/2741188.pdf?src-supplier=Farnell, ComponentLink2Description=http://www.mouser.com/ds/2/212/KEM_C1002_X7R_SMD-357932.pdf?src-supplier=Mouser, ComponentLink2URL=http://www.mouser.com/ds/2/212/KEM_C1002_X7R_SMD-357932.pdf?src-supplier=Mouser, ComponentLink3Description=http://www.alliedelec.com/m/d/51f554c3dd800f51434b811e71a34895.pdf?src-supplier=Allied+Electronics, ComponentLink3URL=http://www.alliedelec.com/m/d/51f554c3dd800f51434b811e71a34895.pdf?src-supplier=Allied+Electronics, ComponentLink4Description=https://datasheet.octopart.com/C1206C105K1RACTU-KEMET-datasheet-74831901.pdf?src-supplier=Newark, ComponentLink4URL=https://datasheet.octopart.com/C1206C105K1RACTU-KEMET-datasheet-74831901.pdf?src-supplier=Newark, ComponentLink5Description=http://datasheet.octopart.com/C1206C105K1RACTU-Kemet-datasheet-46909923.pdf?src-supplier=Onlinecomponents.com, ComponentLink5URL=http://datasheet.octopart.com/C1206C105K1RACTU-Kemet-datasheet-46909923.pdf?src-supplier=Onlinecomponents.com, ComponentLink6Description=http://datasheet.octopart.com/C1206C105K1RACTU-Kemet-datasheet-46909923.pdf?src-supplier=Avnet, ComponentLink6URL=http://datasheet.octopart.com/C1206C105K1RACTU-Kemet-datasheet-46909923.pdf?src-supplier=Avnet, ComponentLink7Description=http://www.farnell.com/datasheets/2741188.pdf?src-supplier=Newark, ComponentLink7URL=http://www.farnell.com/datasheets/2741188.pdf?src-supplier=Newark, ComponentLink8Description=http://datasheet.octopart.com/C1206C105K1RACTU-Kemet-datasheet-46909923.pdf?src-supplier=Digikey, ComponentLink8URL=http://datasheet.octopart.com/C1206C105K1RACTU-Kemet-datasheet-46909923.pdf?src-supplier=Digikey, ComponentLink9Description=http://www.kemet.com/docfinder?Partnumber=C1206C105K1RACTU&src-supplier=Digikey, ComponentLink9URL=http://www.kemet.com/docfinder?Partnumber=C1206C105K1RACTU&src-supplier=Digikey, ComponentLink10Description=https://api.kemet.com/component-edge/download/datasheet/C1206C105K1RACTU.pdf?src-supplier=Digikey, ComponentLink10URL=https://api.kemet.com/component-edge/download/datasheet/C1206C105K1RACTU.pdf?src-supplier=Digikey, ComponentLink11Description=http://datasheet.octopart.com/C1206C105K1RACTU-Kemet-datasheet-46909923.pdf?src-supplier=Distrelec, ComponentLink11URL=http://datasheet.octopart.com/C1206C105K1RACTU-Kemet-datasheet-46909923.pdf?src-supplier=Distrelec, ComponentLink12Description=https://datasheet.octopart.com/C1206C105K1RACTU-Kemet-datasheet-46909923.pdf?src-supplier=Element14, ComponentLink12URL=https://datasheet.octopart.com/C1206C105K1RACTU-Kemet-datasheet-46909923.pdf?src-supplier=Element14, ComponentLink13Description=https://datasheet.octopart.com/C1206C105K1RACTU-KEMET-datasheet-145014209.pdf?src-supplier=Farnell, ComponentLink13URL=https://datasheet.octopart.com/C1206C105K1RACTU-KEMET-datasheet-145014209.pdf?src-supplier=Farnell, ComponentLink14Description=http://www.farnell.com/datasheets/2741188.pdf?src-supplier=Element14, ComponentLink14URL=http://www.farnell.com/datasheets/2741188.pdf?src-supplier=Element14, ComponentLink15Description=http://datasheet.octopart.com/C1206C105K1RACTU-Kemet-datasheet-46909923.pdf?src-supplier=NAC+Semi, ComponentLink15URL=http://datasheet.octopart.com/C1206C105K1RACTU-Kemet-datasheet-46909923.pdf?src-supplier=NAC+Semi, ComponentLink16Description=https://datasheet.octopart.com/C1206C105K1RACTU-KEMET-datasheet-158241793.pdf?src-supplier=TME, ComponentLink16URL=https://datasheet.octopart.com/C1206C105K1RACTU-KEMET-datasheet-158241793.pdf?src-supplier=TME, ComponentLink17Description=http://datasheet.octopart.com/C1206C105K1RACTU-Kemet-datasheet-46909923.pdf?src-supplier=Electro+Sonic, ComponentLink17URL=http://datasheet.octopart.com/C1206C105K1RACTU-Kemet-datasheet-46909923.pdf?src-supplier=Electro+Sonic, ComponentLink18Description="Link Digikey", ComponentLink18URL=https://www.digikey.com/en/products/detail/kemet/C1206C105K1RAC7800/5119820, Depth=1.6mm, Designer=TVBac, Dissipation Factor=2.5%, Height=1.6mm, Length=3.2mm, Material=4241ConductorMaterial, Mounting Technology="Surface Mount", Package=1206, Packaging="Cut Tape", Pricing="1=0.49, 10=0.24, 50=0.24, 100=0.155, 1000=0.148, 10000=0.117 (USD)", Reach SVHC Compliant=No, RoHS=Yes, RoHS Compliant=Yes, Series=C, Stock=49348, Supplier=Mouser, Termination=SMD/SMT, Thickness=0.071inch, Voltage Rating=100V, Voltage Rating (DC)=100V, Weight=0.000571oz, Width=0.063inch
C11: library part "CAP; 100uF; 25V; SMD; EEH-ZA1E101XP", "Cap Aluminum 100uF 25V 20% (6.3 X 7.7mm) SMD 0.03 Ohm 2000mA 5000h 105 C Embossed T/R", Case/Package=Radial, ESR (Equivalent Series Resistance)=30mR, Leakage Current=25uA, Manufacturer=Panasonic, Manufacturer Part Number=EEH-ZA1E101XP, Max Operating Temperature=105°C, Min Operating Temperature=-55°C, Package Quantity=900, Ratings=AEC-Q200, Ripple Current=2A, Supplier Part Number=P15436CT-ND, Tolerance=20%, Voltage=25V, Category="Polymer Capacitors", ComponentLink1Description=https://datasheet.ciiva.com/14818/86aba0000ce136-14818650.pdf?src-supplier=Arrow+Electronics, ComponentLink1URL=https://datasheet.ciiva.com/14818/86aba0000ce136-14818650.pdf?src-supplier=Arrow+Electronics, ComponentLink2Description=https://datasheet.ciiva.com/25614/0900766b81233638-25614238.pdf?src-supplier=Rs, ComponentLink2URL=https://datasheet.ciiva.com/25614/0900766b81233638-25614238.pdf?src-supplier=Rs, ComponentLink3Description=https://datasheet.ciiva.com/6303/aba0000ce136-6303802.pdf?src-supplier=Digikey, ComponentLink3URL=https://datasheet.ciiva.com/6303/aba0000ce136-6303802.pdf?src-supplier=Digikey, ComponentLink4Description=https://datasheet.ciiva.com/6303/aba0000ce136-6303804.pdf?src-supplier=Digikey, ComponentLink4URL=https://datasheet.ciiva.com/6303/aba0000ce136-6303804.pdf?src-supplier=Digikey, ComponentLink5Description=https://datasheet.ciiva.com/6303/aba0000ce136-6303805.pdf?src-supplier=Digikey, ComponentLink5URL=https://datasheet.ciiva.com/6303/aba0000ce136-6303805.pdf?src-supplier=Digikey, ComponentLink6Description=https://datasheet.ciiva.com/6134/1536543-6134360.pdf?src-supplier=Farnell, ComponentLink6URL=https://datasheet.ciiva.com/6134/1536543-6134360.pdf?src-supplier=Farnell, ComponentLink7Description=https://datasheet.ciiva.com/32372/86aba0000ce136-32372459.pdf?src-supplier=Onlinecomponents.com, ComponentLink7URL=https://datasheet.ciiva.com/32372/86aba0000ce136-32372459.pdf?src-supplier=Onlinecomponents.com, ComponentLink8Description=https://datasheet.ciiva.com/14604/70314667-14604008.pdf?src-supplier=Allied+Electronics, ComponentLink8URL=https://datasheet.ciiva.com/14604/70314667-14604008.pdf?src-supplier=Allied+Electronics, ComponentLink9Description=https://datasheet.ciiva.com/48540/eehza-eng-tds-48540972.pdf?src-supplier=Distrelec, ComponentLink9URL=https://datasheet.ciiva.com/48540/eehza-eng-tds-48540972.pdf?src-supplier=Distrelec, ComponentLink10Description=https://datasheet.ciiva.com/7902/1536543-7902997.pdf?src-supplier=Element14, ComponentLink10URL=https://datasheet.ciiva.com/7902/1536543-7902997.pdf?src-supplier=Element14, ComponentLink11Description="Link Digikey", ComponentLink11URL=https://www.digikey.com/en/products/detail/panasonic-electronic-components/EEH-ZA1E101XP/3088115, Construction=Cylindrical, Designer=TVBac, Diameter=6.3mm, Dissipation Factor=14%, Height=7.7mm, Lead Diameter=0.65mm, Lead Free="Lead Free", Lead Pitch=1.8mm, Length=7.7mm, Life (Hours)=5000Hour, Material=Polymer, Mounting Technology="Surface Mount,PCB", Packaging="Tape and Reel", Pins=8, Pricing="1=1.59, 10=1.006, 50=0.7694, 100=0.6957 (USD)", Radiation Hardening=No, Reach SVHC Compliant=No, Ripple Current (AC)=2A, RoHS=Yes, RoHS Compliant=Yes, Series=ZA, Stock=16312, Supplier=Digikey, Technology=HYBRID, Termination=SMD/SMT, Voltage Rating=25V, Voltage Rating (DC)=25V
C16: library part "CAP; 2.2uF; 25V; SMD; 0603; CC0603KRX5R8BB225", "0603 2.2 uF 25 V ±10% Tolerance X5R SMT Multilayer Ceramic Capacitor", Manufacturer=Yageo, Manufacturer Part Number=CC0603KRX5R8BB225, Package=0603, Supplier Part Number=2077058, Category="Ceramic Capacitors", ComponentLink1Description=https://datasheet.ciiva.com/26936/getdatasheetpartid-782757-26936061.pdf?src-supplier=Verical, ComponentLink1URL=https://datasheet.ciiva.com/26936/getdatasheetpartid-782757-26936061.pdf?src-supplier=Verical, Designer=TVBac, Halogen Free=5694HalogenFree, Height=900um, Lead Free=5697LeadFree, Material=4241ConductorMaterial, Pricing="4000=0.0441, 8000=0.0434, 12000=0.0429, 16000=0.0426, 20000=0.0417 (USD)", RoHS=Yes, Stock=108000, Supplier="Future Electronics"
C19: library part "CAP; 0.1uF; 10V; 0603; SMD; CC0603KRX7R6BB104", "Multilayer Ceramic Capacitor, 0.1 uF, 10 V, ± 10%, X7R, 0603 [1608 Metric]", Manufacturer=Yageo, Manufacturer Part Number=CC0603KRX7R6BB104, Package=0603, Supplier Part Number=311-4055-1-ND, Category="Ceramic Capacitors", ComponentLink1Description=https://datasheet.ciiva.com/11586/upy-gphc-x7r-6-3v-to-50v-8-11586327.pdf?src-supplier=Avnet, ComponentLink1URL=https://datasheet.ciiva.com/11586/upy-gphc-x7r-6-3v-to-50v-8-11586327.pdf?src-supplier=Avnet, ComponentLink2Description="Link Digikey", ComponentLink2URL=https://www.digikey.com/en/products/detail/yageo/CC0603KRX7R6BB104/5883741, Designer=TVBac, Halogen Free=5694HalogenFree, Lead Free=5697LeadFree, Material=4241ConductorMaterial, Pricing="1=0.1, 10=0.067, 50=0.0398, 100=0.0314, 500=0.02316, 1000=0.01918, 4000=0.01633, 8000=0.01519, 12000=0.01443, 28000=0.01367, 100000=0.01035, 200000=0.0101, 400000=0.00949 (USD)", RoHS=Yes, Stock=113177, Supplier=Digikey
D1 D2 D3: library part "DIODE; SMD; SCHOTTKY; SS34-HF", "Diode Schottky Si 40V 3A 2-Pin SMA T/R", Manufacturer=Comchip, Manufacturer Part Number=SS34-HF, Supplier Part Number=641-2115-1-ND, Category=LDO, ComponentLink1Description=http://www.comchiptech.com/admin/files/product/20190514101641.pdf?src-supplier=Digikey, ComponentLink1URL=http://www.comchiptech.com/admin/files/product/20190514101641.pdf?src-supplier=Digikey, ComponentLink2Description="Link Digikey", ComponentLink2URL=https://www.digikey.com/en/products/detail/comchip-technology/SS34-HF/10279693, Designer=TVBac, Pricing="1=0.46, 10=0.325, 100=0.164, 500=0.14536, 1000=0.11312, 2000=0.10124 (USD)", RoHS=Yes, RoHS Compliant=Yes, Stock=65957, Supplier=Digikey
D4: library part L0603_RED, "20mA 330mcd Colorless Transparent Lens -20℃~+85℃ Positive Stick 620nm~630nm Red 120° 50mW 2.3V 0603 LED Indication - Discrete ROHS", Manufacture Part Number=XL-1608SURC-06, Manufacturer=XINGLIGHT, Package=0603, Link=https://www.lcsc.com/product-detail/LED-Indication-Discrete_XINGLIGHT-XL-1608SURC-06_C965799.html?s_z=n_LED%200603%20red, Packaging="Cut Tape (CT)"
D5: library part L0603_GREEN, "225mcd~450mcd Colorless Transparent Lens -40℃~+85℃ Positive Stick 520nm~535nm Green 120° 70mW 2.4V~3V 0603 LED Indication - Discrete ROHS", Manufacture Part Number=A-SP192DGHC-C01-4T, Manufacturer=Amicc, Package=0603, Link=https://www.lcsc.com/product-detail/LED-Indication-Discrete_Amicc-A-SP192DGHC-C01-4T_C19171301.html?s_z=n_LED%200603%20green, Packaging="Cut Tape (CT)"
IC1: "Boost type Adjustable 28V 2A 2V~24V SOT-23-6 DC-DC Converters ROHS", LCSC Part=C78162, Manufacturer="SX(Shenzhen Suosemi Tech)", Package=SOT-23-6, Link=https://www.lcsc.com/product-detail/DC-DC-Converters_SX-Shenzhen-Suosemi-Tech-SX1308_C78162.html?s_z=n_sx1308, Manufacture Part Number=SX1308, Packaging="Cut Tape"
IC3: library part INA219AIDR, "26-V 12-bit I2C output digital power monitor 8-SOIC -40 to 125", Case/Package=SOIC, Input Offset Voltage (Vos)=10µV, Manufacturer="Texas Instruments", Manufacturer Lifecycle Status=ACTIVE, Max Operating Temperature=125°C, Max Supply Voltage=5.5V, Min Operating Temperature=-40°C, Min Supply Voltage=3V, Operating Supply Current=1mA, Output Current=10mA, Quiescent Current=700µA, Accuracy=1%, Category="Amplifiers - Op Amps, Buffer, Instrumentation", Common Mode Rejection Ratio=100dB, ComponentLink1Description=https://octopart.com:443/opatz8j6/c1?t=LPR-GkmZO_ZD-NX-ahZdJ4sYICydW44c2UBlUET0hfIsA9Nrjdm8Gx3RZAOP8kdTDH2OjP-SE1TaerxklCx1ZDwRxyehOK9pFkv4PMLI3mW5xMMD8VZ2ES56dMdffvNV-x_EoqMRXU6TLYibM_bKndj1c0JD9XI870WZP0BYQBZNl4xAK99483E3Pcq9CbioArzH5a-oTKjVwwtdto_Yzyuah98mqRg4i18Hqo2FpL5dMbriRMK6ja3tSbL2EQrRvrdOdWX3W4gBXxVTp6DZuYdoMynXlFnVbLKeaM1T6nxR0MXLp7djVRhG4wsRxI-nwoVtlvjBFzcqh97UvjlekN8sVTVDVyyb7EXZQbJ_btva5EUHN3w45iA9qowRXxSAvx_IqA&src-supplier=Texas+Instruments, ComponentLink1URL=https://octopart.com:443/opatz8j6/c1?t=LPR-GkmZO_ZD-NX-ahZdJ4sYICydW44c2UBlUET0hfIsA9Nrjdm8Gx3RZAOP8kdTDH2OjP-SE1TaerxklCx1ZDwRxyehOK9pFkv4PMLI3mW5xMMD8VZ2ES56dMdffvNV-x_EoqMRXU6TLYibM_bKndj1c0JD9XI870WZP0BYQBZNl4xAK99483E3Pcq9CbioArzH5a-oTKjVwwtdto_Yzyuah98mqRg4i18Hqo2FpL5dMbriRMK6ja3tSbL2EQrRvrdOdWX3W4gBXxVTp6DZuYdoMynXlFnVbLKeaM1T6nxR0MXLp7djVRhG4wsRxI-nwoVtlvjBFzcqh97UvjlekN8sVTVDVyyb7EXZQbJ_btva5EUHN3w45iA9qowRXxSAvx_IqA&src-supplier=Texas+Instruments, ComponentLink2Description=https://datasheet.octopart.com:443/INA219AIDR-Texas-Instruments-datasheet-10383171.pdf?src-supplier=Texas+Instruments, ComponentLink2URL=https://datasheet.octopart.com:443/INA219AIDR-Texas-Instruments-datasheet-10383171.pdf?src-supplier=Texas+Instruments, ComponentLink3Description=https://datasheet.octopart.com:443/INA219AIDR-Texas-Instruments-datasheet-10258484.pdf?src-supplier=Texas+Instruments, ComponentLink3URL=https://datasheet.octopart.com:443/INA219AIDR-Texas-Instruments-datasheet-10258484.pdf?src-supplier=Texas+Instruments, ComponentLink4Description=https://sigma.octopart.com:443/49249642/technical_drawing/Texas-Instruments-INA219AIDR.pdf?src-supplier=Texas+Instruments, ComponentLink4URL=https://sigma.octopart.com:443/49249642/technical_drawing/Texas-Instruments-INA219AIDR.pdf?src-supplier=Texas+Instruments, ComponentLink5Description=https://datasheet.octopart.com:443/INA219AIDR-Texas-Instruments-datasheet-102489495.pdf?src-supplier=Upverter, ComponentLink5URL=https://datasheet.octopart.com:443/INA219AIDR-Texas-Instruments-datasheet-102489495.pdf?src-supplier=Upverter, ComponentLink6Description=https://datasheet.octopart.com:443/INA219AIDR-Texas-Instruments-datasheet-24897021.pdf?src-supplier=Upverter, ComponentLink6URL=https://datasheet.octopart.com:443/INA219AIDR-Texas-Instruments-datasheet-24897021.pdf?src-supplier=Upverter, ComponentLink7Description=https://datasheet.octopart.com:443/INA219AIDR-Texas-Instruments-datasheet-11538655.pdf?src-supplier=element14+APAC, ComponentLink7URL=https://datasheet.octopart.com:443/INA219AIDR-Texas-Instruments-datasheet-11538655.pdf?src-supplier=element14+APAC, ComponentLink8Description=https://datasheet.octopart.com:443/INA219AIDR-Texas-Instruments-datasheet-62088703.pdf?src-supplier=element14+APAC, ComponentLink8URL=https://datasheet.octopart.com:443/INA219AIDR-Texas-Instruments-datasheet-62088703.pdf?src-supplier=element14+APAC, ComponentLink9Description=https://datasheet.octopart.com:443/INA219AIDR-Texas-Instruments-datasheet-62277359.pdf?src-supplier=element14+APAC, ComponentLink9URL=https://datasheet.octopart.com:443/INA219AIDR-Texas-Instruments-datasheet-62277359.pdf?src-supplier=element14+APAC, ComponentLink10Description=https://datasheet.octopart.com:443/INA219AIDR-Texas-Instruments-datasheet-164414650.pdf?src-supplier=SHENGYU+ELECTRONICS, ComponentLink10URL=https://datasheet.octopart.com:443/INA219AIDR-Texas-Instruments-datasheet-164414650.pdf?src-supplier=SHENGYU+ELECTRONICS, ComponentLink11Description=https://datasheet.octopart.com:443/INA219AIDR-Texas-Instruments-datasheet-159115060.pdf?src-supplier=LCSC, ComponentLink11URL=https://datasheet.octopart.com:443/INA219AIDR-Texas-Instruments-datasheet-159115060.pdf?src-supplier=LCSC, ComponentLink12Description=https://datasheet.octopart.com:443/INA219AIDR-Texas-Instruments-datasheet-140571431.pdf?src-supplier=Arrow.cn, ComponentLink12URL=https://datasheet.octopart.com:443/INA219AIDR-Texas-Instruments-datasheet-140571431.pdf?src-supplier=Arrow.cn, ComponentLink13Description=https://datasheet.octopart.com:443/INA219AIDR-Texas-Instruments-datasheet-14155040.pdf?src-supplier=iiiC, ComponentLink13URL=https://datasheet.octopart.com:443/INA219AIDR-Texas-Instruments-datasheet-14155040.pdf?src-supplier=iiiC, ComponentLink14Description=http://sigma.octopart.com:80/conflict_mineral_statement/Texas-Instruments-company-63.pdf?src-supplier=Compliance+Statements, ComponentLink14URL=http://sigma.octopart.com:80/conflict_mineral_statement/Texas-Instruments-company-63.pdf?src-supplier=Compliance+Statements, ComponentLink15Description=http://sigma.octopart.com:80/reach_statement/Texas-Instruments-company-64.pdf?src-supplier=Compliance+Statements, ComponentLink15URL=http://sigma.octopart.com:80/reach_statement/Texas-Instruments-company-64.pdf?src-supplier=Compliance+Statements, Contact Plating=Gold, Height=1.75mm, Lead Free="Lead Free", Length=4.9mm, Lifecycle Status=Production, Manufacturer Part Number=INA219AIDR, Number of Amplifiers=1, Packaging=Digi-Reel®, Pins=8, Pricing="1=1.242, 10=1.066, 25=1.013, 100=0.964 (USD)", Radiation Hardening=No, REACH SVHC=No, RoHS=Compliant, Schedule B="8542330000, 8542390000, 8542390000|8542390000|8542390000|8542390000|8542390000", Stock=155, Supplier="Arrow Electronics", Supplier Part Number=INA219AIDR, Thickness=1.58mm, Weight=72.603129mg, Width=3.91mm